# Altium PCB RJ45_BREAKOUT.PcbDoc
Units mm, origin at the board's own origin, x right, y up, seen from the top; angles counter-clockwise.
Board outline 74 x 69 mm, 2 copper layers (Top Layer, Bottom Layer); 9 components, 9 nets, 34 pads, 2 vias.
Unrouted connection lines stored in the file: 1.
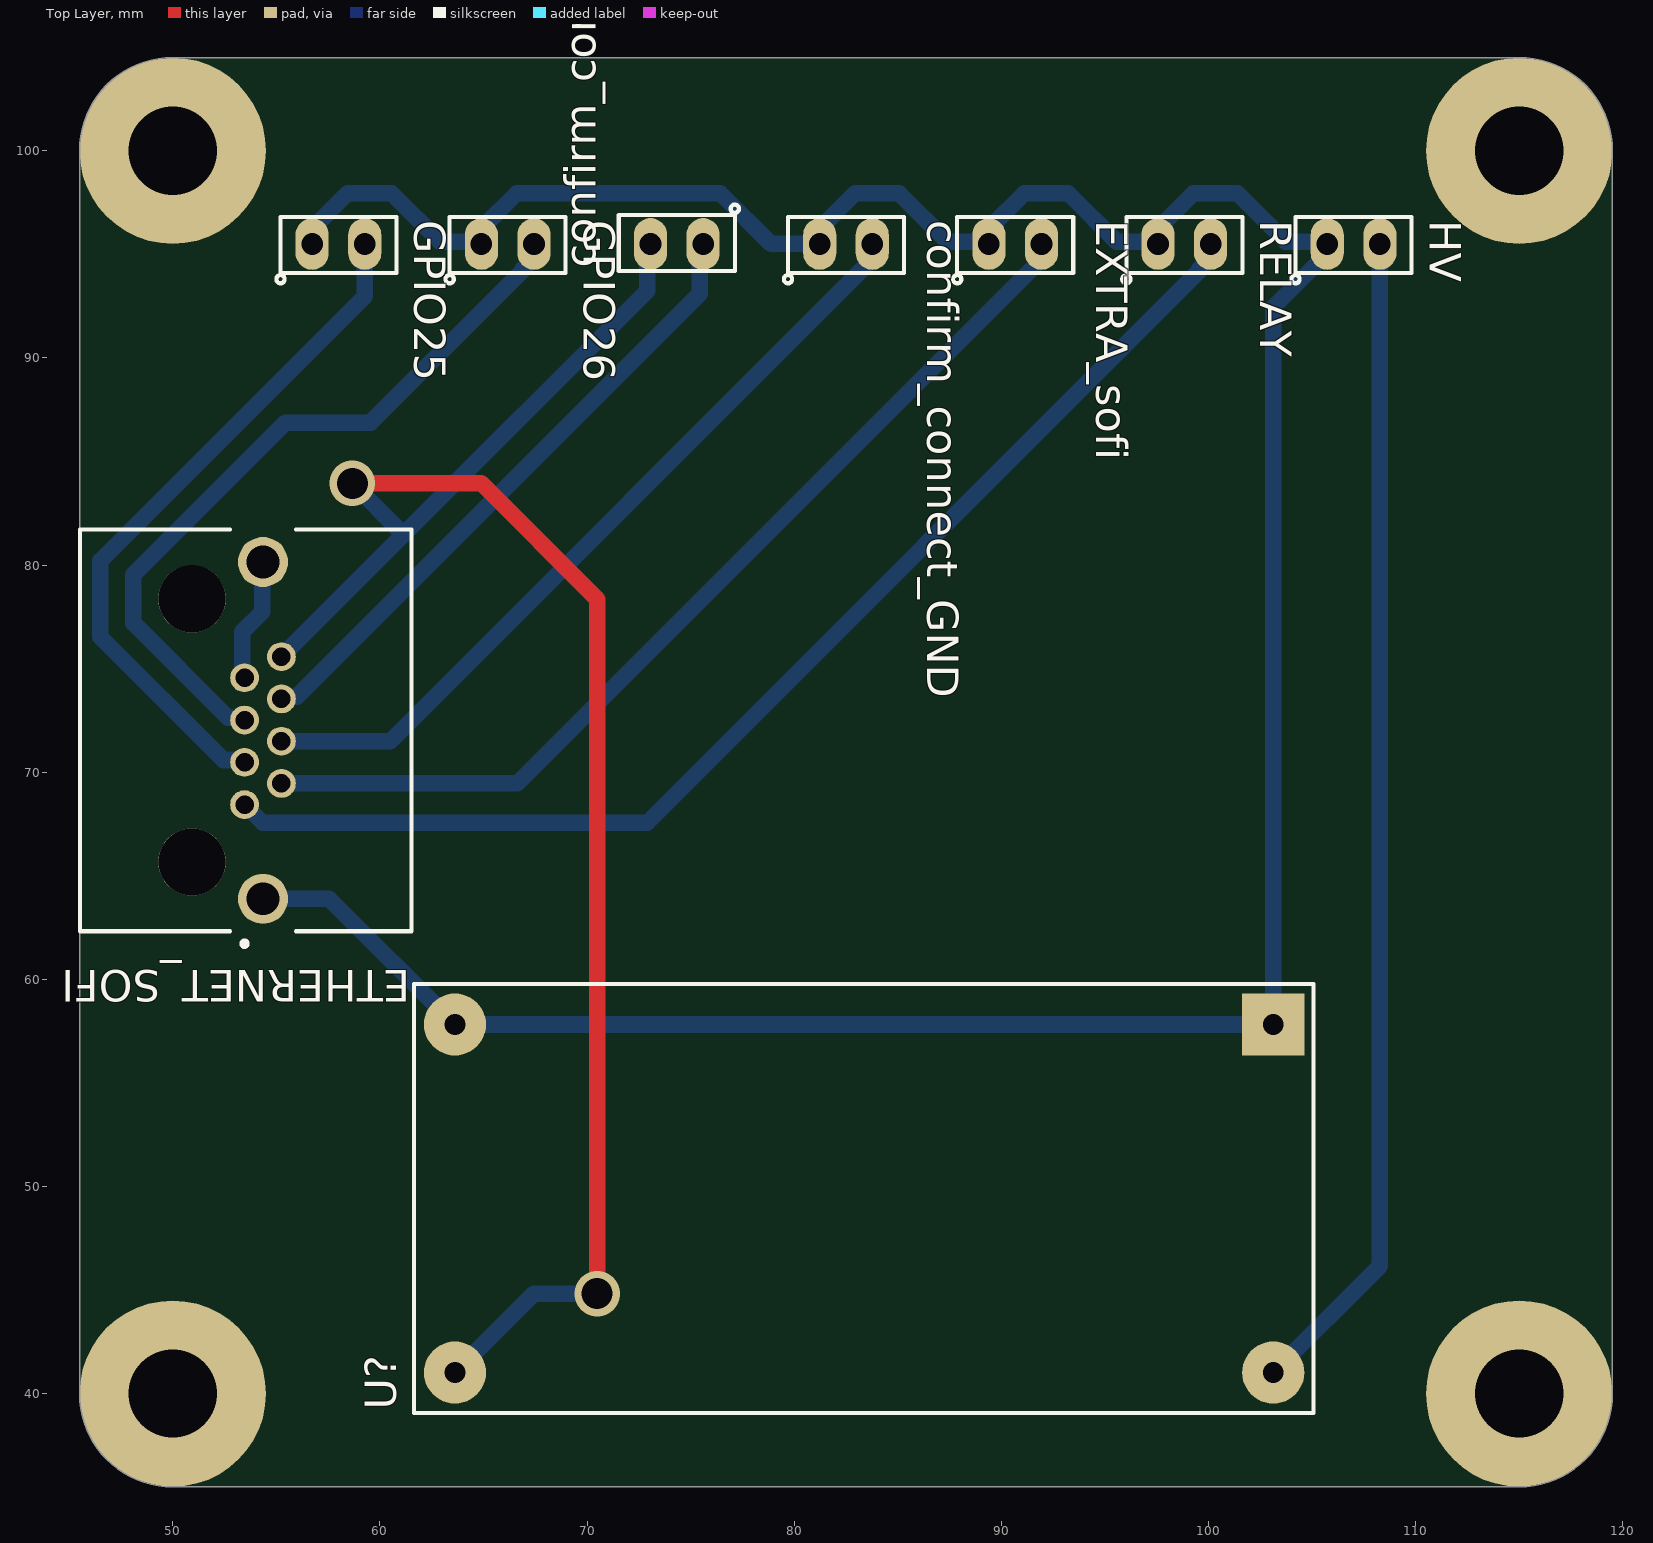
[diagram p0: Top Layer view]
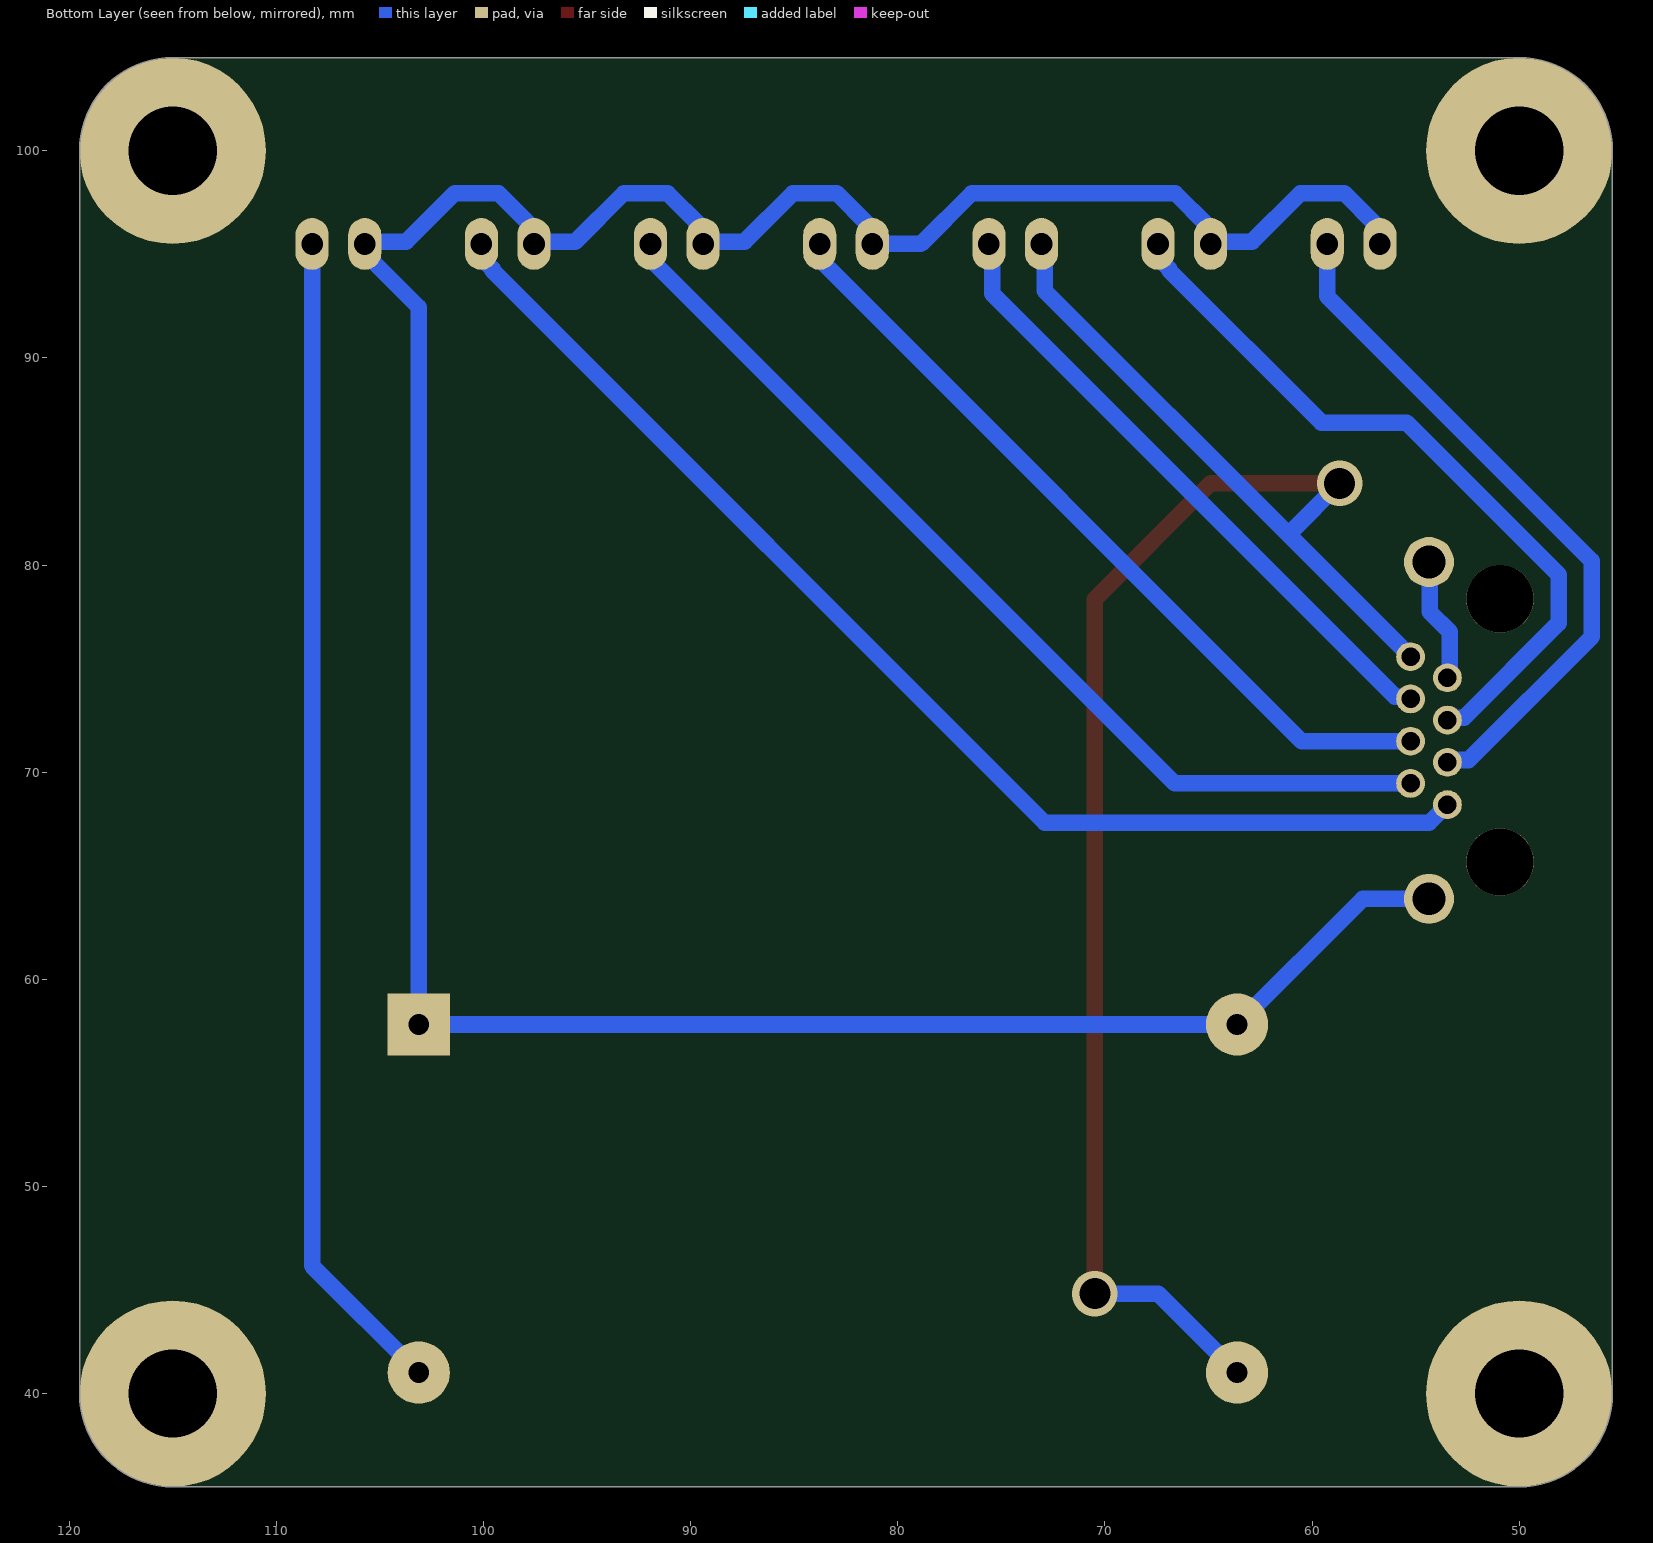
[diagram p1: Bottom Layer view, seen from below]
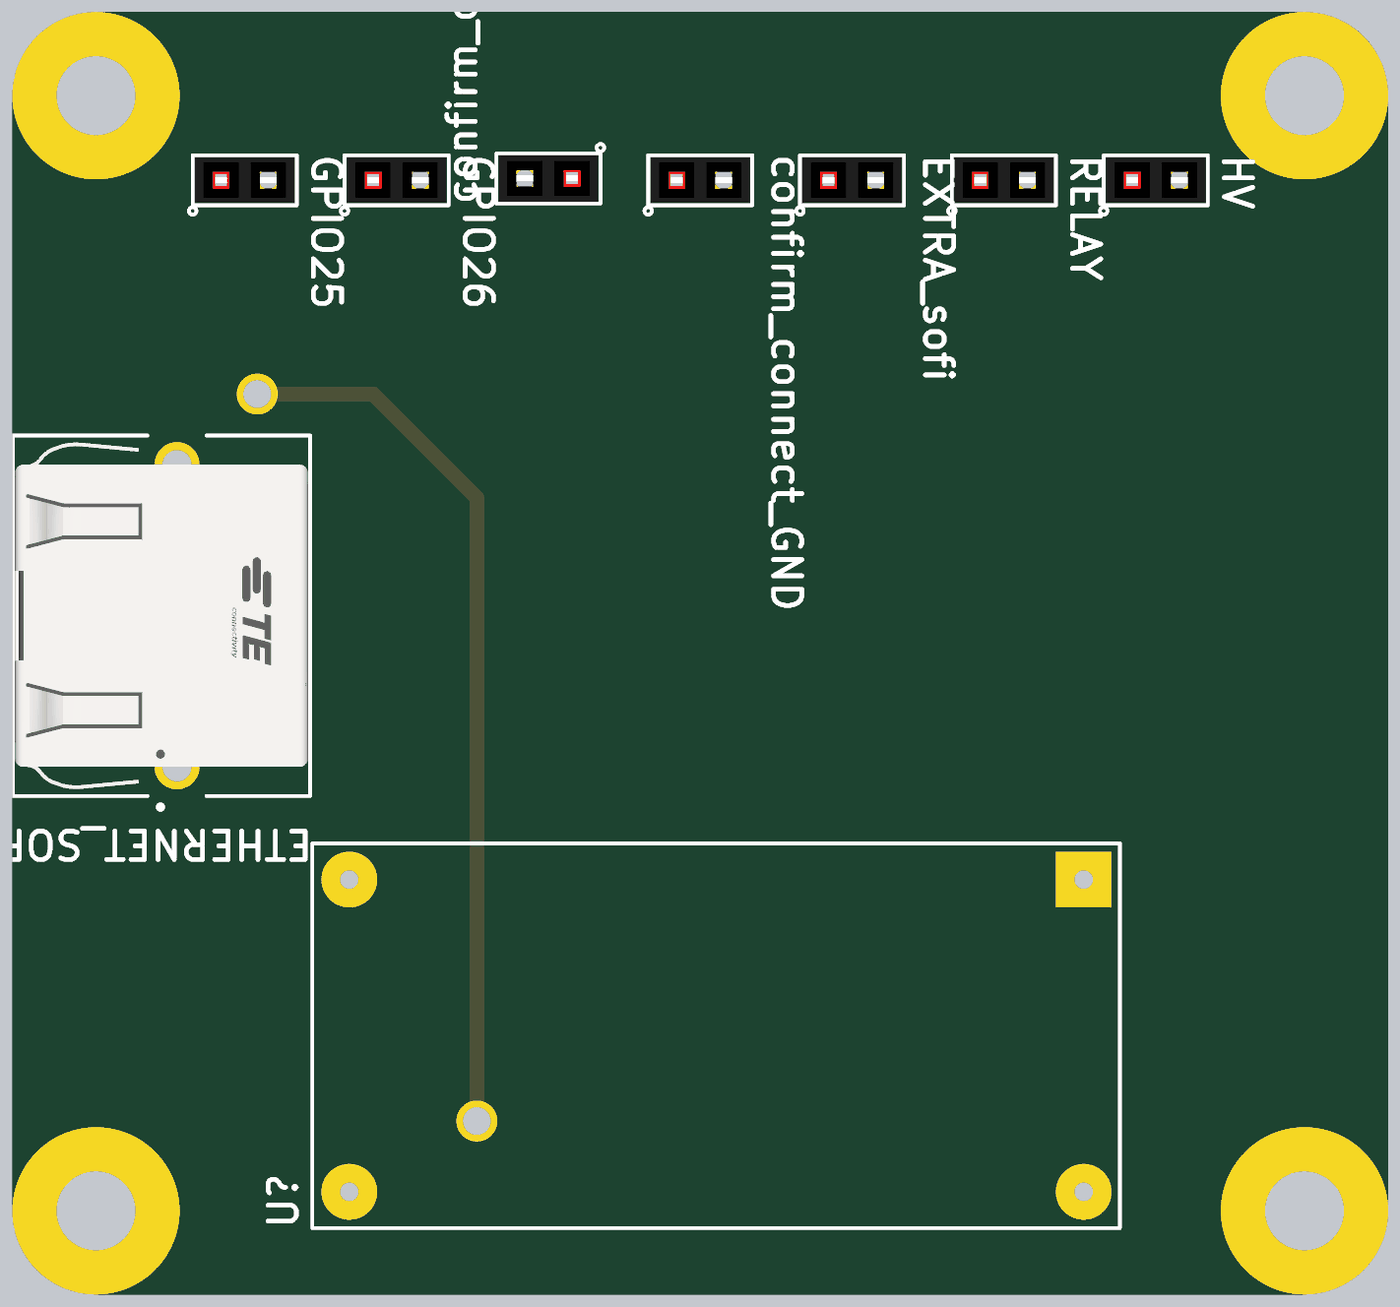
[diagram p2: 3D render of the assembled board from above, using the file's embedded part models]

## Layer stack, top to bottom
Top Solder: solder mask 0.0102, Solder Resist, Dk 3.5
Top Layer: signal copper 0.0356
Dielectric 1: dielectric 0.32, FR-4, Dk 4.8
Bottom Layer: signal copper 0.0356
Bottom Solder: solder mask 0.0102, Solder Resist, Dk 3.5

## Board outline
45.5,40 ccw(c50,40) 50,35.5 115,35.5 ccw(c115,40) 119.5,40 119.5,100 ccw(c115,100) 115,104.5 50,104.5 ccw(c50,100) 45.5,100

## Design rules (kind name [scope] priority, off if disabled: settings)
Clearance [All] p1: gap=0.8 ignorepadtopadclearanceinfootprint=TRUE
HoleSize [All] p1: absolutevalues=TRUE maxlimit=2.54 minlimit=0.8 maxpercent=80.000 minpercent=20.000
PolygonConnect [All] p1: connectstyle=Relief reliefconductorwidth=0.254 reliefentries=4 polygonreliefangle="90 Angle" airgapwidth=0.254
RoutingVias [All] p1: holewidth=1.4 width=2.3 viastyle="Through Hole" minholewidth=1.4 minwidth=2.3 maxholewidth=1.4 maxwidth=2.3
SolderMaskExpansion [All] p1: expansion=0 istentingtop=FALSE
SupplyNets "Schematic Supply Nets" [InNet('GND')] p1: voltage=0.000
Width [All] p1: maxlimit=1 minlimit=0.8 preferedwidth=1 minimp=50.000000 maximp=50.000000 favimp=50.000000
29 further rules are at their usual default settings.

## Components (designator, comment, footprint, x,y, rotation, side; value= is the part's Value field where it differs from the comment)
confirm_connect_3V3 "HDR_F_1X2" HDR_F_1X2 74.333,95.5 r180 top value=HDRF2
confirm_connect_GND "HDR_F_1X2" HDR_F_1X2 82.5,95.5 r0 top locked value=HDRF2
ETHERNET_SOFI "RJ45 (ethernet) connector" FP-1-406541-1-MFG 53.522,72.017 r270 top
EXTRA_sofi "HDR_F_1X2" HDR_F_1X2 90.667,95.5 r0 top locked value=HDRF2
GPIO25 "HDR_F_1X2" HDR_F_1X2 58,95.5 r0 top locked value=HDRF2
GPIO26 "HDR_F_1X2" HDR_F_1X2 66.167,95.5 r0 top locked value=HDRF2
HV "HDR_F_1X2" HDR_F_1X2 107,95.5 r0 top locked value=HDRF2
RELAY "HDR_F_1X2" HDR_F_1X2 98.833,95.5 r0 top locked value=HDRF2
U? "LM2596S-Module" LM2596S-Footprint-1 105.074,59.771 r180 top

## Footprints (in the part's own frame and the unit in brackets; to place one, negate y for a bottom-side part, rotate by r counter-clockwise, add the part's x,y. Pads: shape width x height; smd on the part's side, far side on the other; paste and mask are expansions set on the pad)
FP-1-406541-1-MFG [mm]
  round 1.39 hole 0.89 paste-2539.97 mask+0: 1(3.58,-0.055) 2(2.56,1.725) 3(1.54,-0.055) 4(0.52,1.725) 5(-0.5,-0.055) 6(-1.52,1.725) 7(-2.54,-0.055) 8(-3.56,1.725)
  round 2.42 hole 1.57 paste-2539.97 mask+0: 9(-8.13,0.835) 10(8.13,0.835)
  round 3.25 hole 3.25 unplated paste-2539.97 mask+0: ""(-6.35,-2.595) ""(6.35,-2.595)
  silkscreen extent -9.69,-8 10.42,8, body extent -9.79,-8.1 9.79,8.1, height 0.25
HDR_F_1X2 [mm] "HEADER FEMALE pitch: 2.54mm"
  oval 1.6x2.5 hole 1.05 mask+0.1: 1(-1.27,0) 2(1.27,0)
  silkscreen extent -3,-1.9 2.8,1.3, body extent -2.66,-1.3 2.67,1.2, height 8.5
LM2596S-Footprint-1 [mm]
  round 3 hole 1: 1(1.95,18.75) 3(41.45,18.75) 4(41.45,1.95)
  rect 3x3 hole 1: 2(1.95,1.95)
  silkscreen extent 0,0 43.43,20.7

## Part data
confirm_connect_3V3 confirm_connect_GND EXTRA_sofi GPIO25 GPIO26 HV RELAY: library part CMP-002-00274-1, Component Type=Standard, Design Item ID=HDR_F_1X2, Pins=2, Source="Conn Header.SchLib"
ETHERNET_SOFI: library part CMP-002-00604-1, "Modular Connector, RJ45 Jack, 1 x 1 (Port), 8P8C, Cat5, Through Hole Mount", Max Operating Temperature=85°C, Min Operating Temperature=-40°C, Gender=Female, Mounting Technology=Panel, Pins=2
U?: library part CMP-019-00050-5, "ADIY Module LM2596S DC High Efficiency Voltage Regulator 3.0-40V To 1.5-35V Buck Converter Adjustable", Case/Package=PCB, Dropout Voltage=3.2V, Frequency=150kHz, Max Output Voltage=35V, Max Supply Voltage=40V, Output Current=2A, Output Voltage=5V, Min Supply Voltage=3.2V, Pins=4, URL=https://adiy.in/shop/lm2596-step-down-dc-dc-buck-converter-adjustable-module/

## Free pads (board coordinates)
  round 9 hole 4.25: 1(50,100) 2(115,100) 3(50,40) 4(115,40)

## Via types
v1: diameter 2.2, hole 1.5, Top Layer to Bottom Layer, 2 vias

## Nets (pads, with @x,y where several pads share a name; then routed paths per layer and width w, separated by ;. In a path a pad name is that pad's centre, name@x,y a point inside that pad or via, vN(x,y) a via of type N, cw(c..) or ccw(c..) an arc to the next point about the centre after c; other vN are vias at no path point)
GND: confirm_connect_GND.1 ETHERNET_SOFI.7 ETHERNET_SOFI.9 ETHERNET_SOFI.10 EXTRA_sofi.1 GPIO25.1 GPIO26.1 HV.1 RELAY.1 U?.2 U?.4 | length 157.4
  Bottom Layer w0.8: ETHERNET_SOFI.7 53.467,74.717 53.352,74.832 53.352,76.768 54.321,77.737 54.321,80.111 ETHERNET_SOFI.9 ; ETHERNET_SOFI.10 57.558,63.887 U?.4 U?.2 103.124,92.444 105.73,95.05 HV.1 105.616,95.614 103.73,95.614 101.394,97.95 99.275,97.95 97.716,96.391 97.716,95.653 RELAY.1 97.449,95.614 95.563,95.614 93.228,97.95 91.108,97.95 89.55,96.391 89.55,95.653 EXTRA_sofi.1 89.282,95.614 87.397,95.614 85.061,97.95 82.942,97.95 81.383,96.391 81.383,95.653 confirm_connect_GND.1 78.882,95.5 76.432,97.95 66.608,97.95 65.05,96.391 65.05,95.653 GPIO26.1 64.782,95.614 62.897,95.614 60.561,97.95 58.442,97.95 56.883,96.391 56.883,95.653 GPIO25.1
Netconfirm_connect_3V3_1: confirm_connect_3V3.1 ETHERNET_SOFI.6 | length 30.8
  Bottom Layer w0.8: ETHERNET_SOFI.6 55.36,73.65 56,73.65 75.45,93.1 75.45,95.347 confirm_connect_3V3.1
Netconfirm_connect_3V3_2: confirm_connect_3V3.2 ETHERNET_SOFI.8 U?.3 | length 87
  Top Layer w0.8: v1(58.674,83.947) 64.897,83.947 70.485,78.359 v1(70.485,44.831)
  Bottom Layer w0.8: ETHERNET_SOFI.8 61.018,81.348 ; v1(58.674,83.947) 61.018,81.603 61.018,81.348 ; U?.3 67.434,44.831 v1(70.485,44.831) ; confirm_connect_3V3.2 72.91,95.347 72.91,93.24 61.018,81.348
Netconfirm_connect_GND_2: confirm_connect_GND.2 ETHERNET_SOFI.4 | length 38.9
  Bottom Layer w0.8: ETHERNET_SOFI.4 60.505,71.497 83.617,94.609 83.617,95.347 confirm_connect_GND.2
NetETHERNET_SOFI_1: ETHERNET_SOFI.1 RELAY.2 | length 59
  Bottom Layer w0.8: ETHERNET_SOFI.1 54.342,67.562 72.904,67.562 99.563,94.222 99.563,94.294 100.103,94.834 RELAY.2
NetETHERNET_SOFI_2: ETHERNET_SOFI.2 EXTRA_sofi.2 | length 47.9
  Bottom Layer w0.8: ETHERNET_SOFI.2 66.632,69.457 91.784,94.609 91.784,95.347 EXTRA_sofi.2
NetETHERNET_SOFI_3: ETHERNET_SOFI.3 GPIO25.2 | length 33.7
  Bottom Layer w0.8: ETHERNET_SOFI.3 53.354,70.59 52.446,70.59 46.502,76.534 46.502,80.2 59.27,92.968 GPIO25.2
NetETHERNET_SOFI_5: ETHERNET_SOFI.5 GPIO26.2 | length 36
  Bottom Layer w0.8: ETHERNET_SOFI.5 53.354,72.63 52.669,72.63 48.102,77.197 48.102,79.537 55.444,86.879 59.554,86.879 66.897,94.222 66.897,94.294 67.437,94.834 GPIO26.2
NetHV_2: HV.2 U?.1 | length 56.6
  Bottom Layer w0.8: U?.1 108.27,46.167 HV.2
pads on no net: ETHERNET_SOFI.

## Silkscreen, mask and mechanical layers (free items; w line width, h text height)
Mechanical 1:
  the board outline again, w0.254